# EAGLE board APA106_uno_shield (EAGLE 7.4.0)
CNAME: Scotty Allen
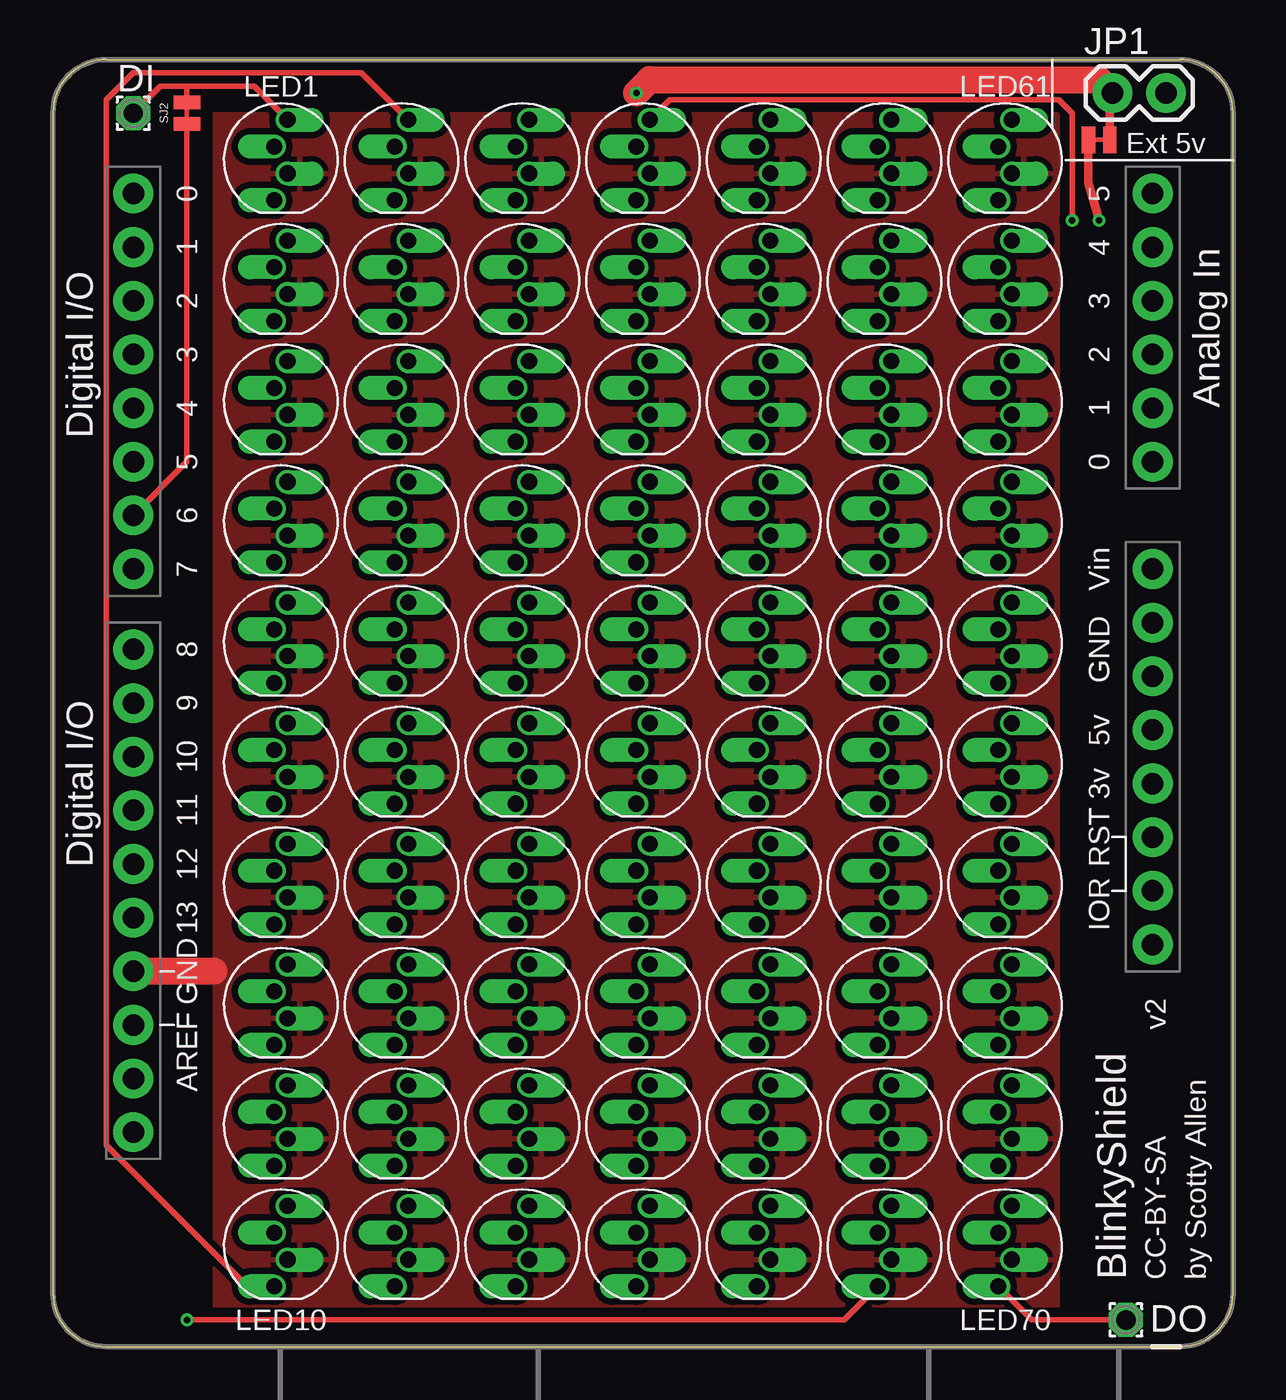
[diagram p0: board, top side]
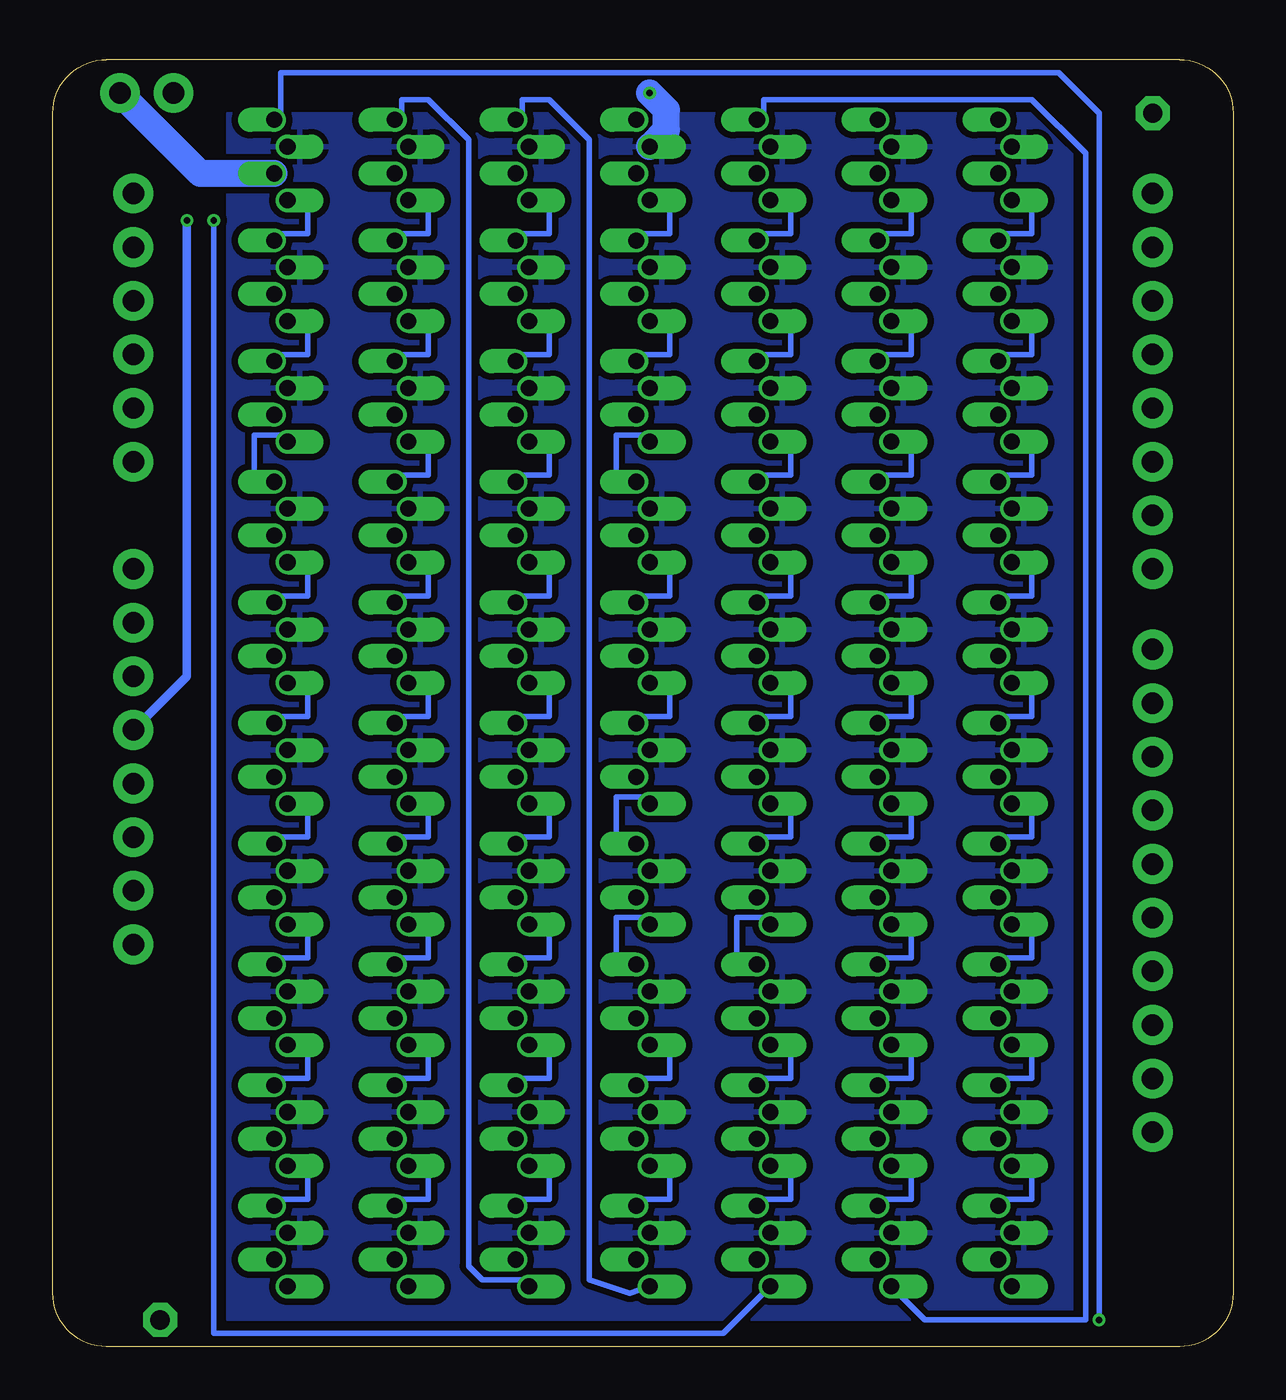
[diagram p1: board, bottom side, seen from below]

Size 55.88 x 60.96 mm. Coordinates in mm from the lower left corner, seen from the top.
Outline: 0,2.54 arc90 2.54,0 53.34,0 arc90 55.88,2.54 55.88,58.42 arc90 53.34,60.96 2.54,60.96 arc90 0,58.42 0,2.54
Copper layers (1*16): Top 0.035mm / dielectric 1.5mm / Bottom 0.035mm
Design rules "dirt_cheap_dirty_boards.v1 *": minimum track width 5mil, minimum drill 12mil, track to track 5mil, track to pad 5mil, pad to pad 5mil, via to via 5mil, smd to smd 0mil, copper to edge 10mil, drill to drill 10mil, minimum pad ring 5mil, minimum via ring 6mil, stop-mask expansion 2mil, vias tented up to drill 25mil, thermal gap 10mil
Net classes: 0 default: width 0.254 mm; 1 power: width 1.27 mm

## Footprints (pad centres in the part's own frame; a part is rotated, then mirrored left to right if it is on the bottom)
1,6/0,9 = drill 0.914 pad 1.6 octagon: 1 0,0
UNO_R3_SHIELD_NOLABELS = drill 1.016 pad 1.88: 3.3V 52.07,26.67; 5V 52.07,29.21; A0 52.07,41.91; A1 52.07,44.45; A2 52.07,46.99; A3 52.07,49.53; A4 52.07,52.07; A5 52.07,54.61; AREF 3.81,15.24; D2 3.81,49.53; D3 3.81,46.99; D4 3.81,44.45; D5 3.81,41.91; D6 3.81,39.37; D7 3.81,36.83; D8 3.81,33.02; D9 3.81,30.48; D10 3.81,27.94; D11 3.81,25.4; D12 3.81,22.86; D13 3.81,20.32; GND@0 52.07,31.75; GND@1 52.07,34.29; GND@2 3.81,17.78; IOREF 52.07,21.59; NC 52.07,19.05; RES 52.07,24.13; RX 3.81,54.61; SCL 3.81,10.16; SDA 3.81,12.7; TX 3.81,52.07; VIN 52.07,36.83
1X02 = drill 1.016 pad 1.88: 1 0,0; 2 2.54,0
LED-5MM-4PIN-HOLE-OFFSET = drill 0.762 pad 1.016 offset: 1 -1.905,0.318; 2 -0.635,-0.318; 3 0.635,0.318; 4 1.905,-0.318
PAD-JUMPER-2-NC_BY_TRACE_NO_SILK = smd 0.635 x 1.27: 1 -0.508,0; 2 0.508,0

## Placement (x,y rotation side)
DI  [1,6/0,9]  3.81,58.42 0 top
DO  [1,6/0,9]  50.8,1.27 0 top
FRAME1  FRAME-LETTER  [CREATIVE_COMMONS]  -5.71,-25.4 0 top  (outside the outline)
J1  ARDUINO_R3_SHIELDNOLABELS  [UNO_R3_SHIELD_NOLABELS]  0,0 0 top
JP1  [1X02]  50.16,59.37 0 top
LED1  LED-APA106HOLE-OFFSET  [LED-5MM-4PIN-HOLE-OFFSET]  10.79,56.2 270 top
LED2  LED-APA106HOLE-OFFSET  [LED-5MM-4PIN-HOLE-OFFSET]  10.79,50.48 270 top
LED3  LED-APA106HOLE-OFFSET  [LED-5MM-4PIN-HOLE-OFFSET]  10.79,44.77 270 top
LED4  LED-APA106HOLE-OFFSET  [LED-5MM-4PIN-HOLE-OFFSET]  10.79,39.05 270 top
LED5  LED-APA106HOLE-OFFSET  [LED-5MM-4PIN-HOLE-OFFSET]  10.79,33.34 270 top
LED6  LED-APA106HOLE-OFFSET  [LED-5MM-4PIN-HOLE-OFFSET]  10.79,27.62 270 top
LED7  LED-APA106HOLE-OFFSET  [LED-5MM-4PIN-HOLE-OFFSET]  10.79,21.91 270 top
LED8  LED-APA106HOLE-OFFSET  [LED-5MM-4PIN-HOLE-OFFSET]  10.79,16.19 270 top
LED9  LED-APA106HOLE-OFFSET  [LED-5MM-4PIN-HOLE-OFFSET]  10.79,10.48 270 top
LED10  LED-APA106HOLE-OFFSET  [LED-5MM-4PIN-HOLE-OFFSET]  10.79,4.76 270 top
LED11  LED-APA106HOLE-OFFSET  [LED-5MM-4PIN-HOLE-OFFSET]  16.51,56.2 270 top
LED12  LED-APA106HOLE-OFFSET  [LED-5MM-4PIN-HOLE-OFFSET]  16.51,50.48 270 top
LED13  LED-APA106HOLE-OFFSET  [LED-5MM-4PIN-HOLE-OFFSET]  16.51,44.77 270 top
LED14  LED-APA106HOLE-OFFSET  [LED-5MM-4PIN-HOLE-OFFSET]  16.51,39.05 270 top
LED15  LED-APA106HOLE-OFFSET  [LED-5MM-4PIN-HOLE-OFFSET]  16.51,33.34 270 top
LED16  LED-APA106HOLE-OFFSET  [LED-5MM-4PIN-HOLE-OFFSET]  16.51,27.62 270 top
LED17  LED-APA106HOLE-OFFSET  [LED-5MM-4PIN-HOLE-OFFSET]  16.51,21.91 270 top
LED18  LED-APA106HOLE-OFFSET  [LED-5MM-4PIN-HOLE-OFFSET]  16.51,16.19 270 top
LED19  LED-APA106HOLE-OFFSET  [LED-5MM-4PIN-HOLE-OFFSET]  16.51,10.48 270 top
LED20  LED-APA106HOLE-OFFSET  [LED-5MM-4PIN-HOLE-OFFSET]  16.51,4.76 270 top
LED21  LED-APA106HOLE-OFFSET  [LED-5MM-4PIN-HOLE-OFFSET]  22.23,56.2 270 top
LED22  LED-APA106HOLE-OFFSET  [LED-5MM-4PIN-HOLE-OFFSET]  22.23,50.48 270 top
LED23  LED-APA106HOLE-OFFSET  [LED-5MM-4PIN-HOLE-OFFSET]  22.23,44.77 270 top
LED24  LED-APA106HOLE-OFFSET  [LED-5MM-4PIN-HOLE-OFFSET]  22.23,39.05 270 top
LED25  LED-APA106HOLE-OFFSET  [LED-5MM-4PIN-HOLE-OFFSET]  22.23,33.34 270 top
LED26  LED-APA106HOLE-OFFSET  [LED-5MM-4PIN-HOLE-OFFSET]  22.23,27.62 270 top
LED27  LED-APA106HOLE-OFFSET  [LED-5MM-4PIN-HOLE-OFFSET]  22.23,21.91 270 top
LED28  LED-APA106HOLE-OFFSET  [LED-5MM-4PIN-HOLE-OFFSET]  22.23,16.19 270 top
LED29  LED-APA106HOLE-OFFSET  [LED-5MM-4PIN-HOLE-OFFSET]  22.23,10.48 270 top
LED30  LED-APA106HOLE-OFFSET  [LED-5MM-4PIN-HOLE-OFFSET]  22.23,4.76 270 top
LED31  LED-APA106HOLE-OFFSET  [LED-5MM-4PIN-HOLE-OFFSET]  27.94,56.2 270 top
LED32  LED-APA106HOLE-OFFSET  [LED-5MM-4PIN-HOLE-OFFSET]  27.94,50.48 270 top
LED33  LED-APA106HOLE-OFFSET  [LED-5MM-4PIN-HOLE-OFFSET]  27.94,44.77 270 top
LED34  LED-APA106HOLE-OFFSET  [LED-5MM-4PIN-HOLE-OFFSET]  27.94,39.05 270 top
LED35  LED-APA106HOLE-OFFSET  [LED-5MM-4PIN-HOLE-OFFSET]  27.94,33.34 270 top
LED36  LED-APA106HOLE-OFFSET  [LED-5MM-4PIN-HOLE-OFFSET]  27.94,27.62 270 top
LED37  LED-APA106HOLE-OFFSET  [LED-5MM-4PIN-HOLE-OFFSET]  27.94,21.91 270 top
LED38  LED-APA106HOLE-OFFSET  [LED-5MM-4PIN-HOLE-OFFSET]  27.94,16.19 270 top
LED39  LED-APA106HOLE-OFFSET  [LED-5MM-4PIN-HOLE-OFFSET]  27.94,10.48 270 top
LED40  LED-APA106HOLE-OFFSET  [LED-5MM-4PIN-HOLE-OFFSET]  27.94,4.76 270 top
LED41  LED-APA106HOLE-OFFSET  [LED-5MM-4PIN-HOLE-OFFSET]  33.66,56.2 270 top
LED42  LED-APA106HOLE-OFFSET  [LED-5MM-4PIN-HOLE-OFFSET]  33.66,50.48 270 top
LED43  LED-APA106HOLE-OFFSET  [LED-5MM-4PIN-HOLE-OFFSET]  33.66,44.77 270 top
LED44  LED-APA106HOLE-OFFSET  [LED-5MM-4PIN-HOLE-OFFSET]  33.66,39.05 270 top
LED45  LED-APA106HOLE-OFFSET  [LED-5MM-4PIN-HOLE-OFFSET]  33.66,33.34 270 top
LED46  LED-APA106HOLE-OFFSET  [LED-5MM-4PIN-HOLE-OFFSET]  33.66,27.62 270 top
LED47  LED-APA106HOLE-OFFSET  [LED-5MM-4PIN-HOLE-OFFSET]  33.66,21.91 270 top
LED48  LED-APA106HOLE-OFFSET  [LED-5MM-4PIN-HOLE-OFFSET]  33.66,16.19 270 top
LED49  LED-APA106HOLE-OFFSET  [LED-5MM-4PIN-HOLE-OFFSET]  33.66,10.48 270 top
LED50  LED-APA106HOLE-OFFSET  [LED-5MM-4PIN-HOLE-OFFSET]  33.66,4.76 270 top
LED51  LED-APA106HOLE-OFFSET  [LED-5MM-4PIN-HOLE-OFFSET]  39.37,56.2 270 top
LED52  LED-APA106HOLE-OFFSET  [LED-5MM-4PIN-HOLE-OFFSET]  39.37,50.48 270 top
LED53  LED-APA106HOLE-OFFSET  [LED-5MM-4PIN-HOLE-OFFSET]  39.37,44.77 270 top
LED54  LED-APA106HOLE-OFFSET  [LED-5MM-4PIN-HOLE-OFFSET]  39.37,39.05 270 top
LED55  LED-APA106HOLE-OFFSET  [LED-5MM-4PIN-HOLE-OFFSET]  39.37,33.34 270 top
LED56  LED-APA106HOLE-OFFSET  [LED-5MM-4PIN-HOLE-OFFSET]  39.37,27.62 270 top
LED57  LED-APA106HOLE-OFFSET  [LED-5MM-4PIN-HOLE-OFFSET]  39.37,21.91 270 top
LED58  LED-APA106HOLE-OFFSET  [LED-5MM-4PIN-HOLE-OFFSET]  39.37,16.19 270 top
LED59  LED-APA106HOLE-OFFSET  [LED-5MM-4PIN-HOLE-OFFSET]  39.37,10.48 270 top
LED60  LED-APA106HOLE-OFFSET  [LED-5MM-4PIN-HOLE-OFFSET]  39.37,4.76 270 top
LED61  LED-APA106HOLE-OFFSET  [LED-5MM-4PIN-HOLE-OFFSET]  45.09,56.2 270 top
LED62  LED-APA106HOLE-OFFSET  [LED-5MM-4PIN-HOLE-OFFSET]  45.09,50.48 270 top
LED63  LED-APA106HOLE-OFFSET  [LED-5MM-4PIN-HOLE-OFFSET]  45.09,44.77 270 top
LED64  LED-APA106HOLE-OFFSET  [LED-5MM-4PIN-HOLE-OFFSET]  45.09,39.05 270 top
LED65  LED-APA106HOLE-OFFSET  [LED-5MM-4PIN-HOLE-OFFSET]  45.09,33.34 270 top
LED66  LED-APA106HOLE-OFFSET  [LED-5MM-4PIN-HOLE-OFFSET]  45.09,27.62 270 top
LED67  LED-APA106HOLE-OFFSET  [LED-5MM-4PIN-HOLE-OFFSET]  45.09,21.91 270 top
LED68  LED-APA106HOLE-OFFSET  [LED-5MM-4PIN-HOLE-OFFSET]  45.09,16.19 270 top
LED69  LED-APA106HOLE-OFFSET  [LED-5MM-4PIN-HOLE-OFFSET]  45.09,10.48 270 top
LED70  LED-APA106HOLE-OFFSET  [LED-5MM-4PIN-HOLE-OFFSET]  45.09,4.76 270 top
SJ1  JUMPER-PAD-2-NC_BY_TRACENO_SILK  [PAD-JUMPER-2-NC_BY_TRACE_NO_SILK]  49.53,57.15 0 top
SJ2  JUMPER-PAD-2-NC_BY_TRACENO_SILK  [PAD-JUMPER-2-NC_BY_TRACE_NO_SILK]  6.35,58.42 90 top

## Library data of the parts
DI DO = wirepad
FRAME1 = SparkFun-Aesthetics
J1 LED1-LED70 SJ1 SJ2 = scotty
JP1 = SparkFun-Connectors

## Nets
DI: DI.1 LED1.1 SJ2.2
GND [power]: J1.GND@2 JP1.2 LED1.3 LED2.3 LED3.3 LED4.3 LED5.3 LED6.3 LED7.3 LED8.3 LED9.3 LED10.3 LED11.3 LED12.3 LED13.3 LED14.3 LED15.3 LED16.3 LED17.3 LED18.3 LED19.3 LED20.3 LED21.3 LED22.3 LED23.3 LED24.3 LED25.3 LED26.3 LED27.3 LED28.3 LED29.3 LED30.3 LED31.3 LED32.3 LED33.3 LED34.3 LED35.3 LED36.3 LED37.3 LED38.3 LED39.3 LED40.3 LED41.3 LED42.3 LED43.3 LED44.3 LED45.3 LED46.3 LED47.3 LED48.3 LED49.3 LED50.3 LED51.3 LED52.3 LED53.3 LED54.3 LED55.3 LED56.3 LED57.3 LED58.3 LED59.3 LED60.3 LED61.3 LED62.3 LED63.3 LED64.3 LED65.3 LED66.3 LED67.3 LED68.3 LED69.3 LED70.3
N$1: LED1.4 LED2.1
N$2: LED2.4 LED3.1
N$3: LED3.4 LED4.1
N$4: LED4.4 LED5.1
N$5: LED6.4 LED7.1
N$6: LED7.4 LED8.1
N$7: LED37.4 LED38.1
N$8: LED5.4 LED6.1
N$9: LED8.4 LED9.1
N$10: LED10.4 LED11.1
N$11: LED19.4 LED20.1
N$12: LED20.4 LED21.1
N$13: LED11.4 LED12.1
N$14: LED12.4 LED13.1
N$15: LED21.4 LED22.1
N$16: LED22.4 LED23.1
N$17: LED18.4 LED19.1
N$18: LED23.4 LED24.1
N$19: LED13.4 LED14.1
N$20: LED9.4 LED10.1
N$21: LED14.4 LED15.1
N$22: LED15.4 LED16.1
N$23: LED16.4 LED17.1
N$24: LED17.4 LED18.1
N$25: LED24.4 LED25.1
N$26: LED25.4 LED26.1
N$27: LED26.4 LED27.1
N$28: LED28.4 LED29.1
N$29: LED29.4 LED30.1
N$30: LED30.4 LED31.1
N$31: LED31.4 LED32.1
N$32: LED27.4 LED28.1
N$33: LED32.4 LED33.1
N$34: LED33.4 LED34.1
N$35: LED34.4 LED35.1
N$36: LED35.4 LED36.1
N$37: LED38.4 LED39.1
N$38: LED39.4 LED40.1
N$39: LED40.4 LED41.1
N$40: LED36.4 LED37.1
N$41: LED41.4 LED42.1
N$42: LED42.4 LED43.1
N$43: LED43.4 LED44.1
N$44: LED44.4 LED45.1
N$45: LED46.4 LED47.1
N$46: LED47.4 LED48.1
N$47: LED48.4 LED49.1
N$48: LED49.4 LED50.1
N$49: LED45.4 LED46.1
N$50: LED50.4 LED51.1
N$51: LED51.4 LED52.1
N$52: LED52.4 LED53.1
N$53: LED53.4 LED54.1
N$54: LED55.4 LED56.1
N$55: LED56.4 LED57.1
N$56: LED57.4 LED58.1
N$57: LED58.4 LED59.1
N$58: LED54.4 LED55.1
N$59: LED59.4 LED60.1
N$60: LED60.4 LED61.1
N$61: LED61.4 LED62.1
N$62: LED62.4 LED63.1
N$63: LED64.4 LED65.1
N$64: LED65.4 LED66.1
N$65: LED67.4 LED68.1
N$66: LED63.4 LED64.1
N$67: LED68.4 LED69.1
N$68: LED66.4 LED67.1
N$69: LED69.4 LED70.1
N$70 [power]: J1.5V SJ1.1
N$71: DO.1 LED70.4
N$72: J1.D6 SJ2.1
VCC [power]: JP1.1 LED1.2 LED2.2 LED3.2 LED4.2 LED5.2 LED6.2 LED7.2 LED8.2 LED9.2 LED10.2 LED11.2 LED12.2 LED13.2 LED14.2 LED15.2 LED16.2 LED17.2 LED18.2 LED19.2 LED20.2 LED21.2 LED22.2 LED23.2 LED24.2 LED25.2 LED26.2 LED27.2 LED28.2 LED29.2 LED30.2 LED31.2 LED32.2 LED33.2 LED34.2 LED35.2 LED36.2 LED37.2 LED38.2 LED39.2 LED40.2 LED41.2 LED42.2 LED43.2 LED44.2 LED45.2 LED46.2 LED47.2 LED48.2 LED49.2 LED50.2 LED51.2 LED52.2 LED53.2 LED54.2 LED55.2 LED56.2 LED57.2 LED58.2 LED59.2 LED60.2 LED61.2 LED62.2 LED63.2 LED64.2 LED65.2 LED66.2 LED67.2 LED68.2 LED69.2 LED70.2 SJ1.2

## Tracks (layer width: path | path; a pad name or v marks a point on that pad's centre or on a via)
DI
  Top 0.254: LED1.1 9.53,59.69 6.35,59.69 | 6.35,59.69 5.08,59.69 DI.1 | SJ2.2 6.35,59.69
GND
  Top 1.27: 7.62,17.78 J1.GND@2
  Bottom 1.27: JP1.2 48.9,55.56 LED61.3
  pour Top (isolate 0.305): 7.62,58.42 47.62,58.42 47.62,39.37 47.62,1.91 7.62,1.91 7.62,2.54
N$1
  Bottom 0.254: LED2.1 10.79,52.7 9.53,52.7 9.53,53.98 10.16,54.61 LED1.4
N$2
  Bottom 0.254: LED3.1 10.79,46.99 9.53,46.99 9.53,48.26 10.16,48.9 LED2.4
N$3
  Bottom 0.254: LED4.1 10.79,41.27 9.53,41.27 9.53,42.55 10.16,43.18 LED3.4
N$4
  Bottom 0.254: LED5.1 10.79,35.56 9.53,35.56 9.53,36.83 10.16,37.47 LED4.4
N$5
  Bottom 0.254: LED7.1 10.79,24.13 9.53,24.13 9.53,25.4 10.16,26.04 LED6.4
N$6
  Bottom 0.254: LED8.1 10.79,18.41 9.53,18.41 9.53,19.68 10.16,20.32 LED7.4
N$7
  Bottom 0.254: LED37.4 27.94,20.32 29.21,20.32 29.21,18.41 28.57,17.78 LED38.1
N$8
  Bottom 0.254: LED6.1 10.79,29.84 9.53,29.84 9.53,31.11 10.16,31.75 LED5.4
N$9
  Bottom 0.254: LED9.1 10.79,12.7 9.53,12.7 9.53,13.97 10.16,14.61 LED8.4
N$10
  Top 0.254: LED11.1 14.61,60.33 3.81,60.33 2.54,59.05 2.54,9.53 8.89,3.17 10.16,3.17 LED10.4
N$11
  Bottom 0.254: LED20.1 16.51,6.99 15.24,6.99 15.24,8.26 15.88,8.89 LED19.4
N$12
  Bottom 0.254: LED20.4 14.61,1.27 6.99,1.27 6.99,56.52 9.53,59.05 22.23,59.05 22.23,58.42 LED21.1
N$13
  Bottom 0.254: LED12.1 16.51,52.7 15.24,52.7 15.24,53.98 15.88,54.61 LED11.4
N$14
  Bottom 0.254: LED13.1 16.51,46.99 15.24,46.99 15.24,48.26 15.88,48.9 LED12.4
N$15
  Bottom 0.254: LED22.1 22.23,52.7 20.95,52.7 20.95,53.98 21.59,54.61 LED21.4
N$16
  Bottom 0.254: LED23.1 22.23,46.99 20.95,46.99 20.95,48.26 21.59,48.9 LED22.4
N$17
  Bottom 0.254: LED19.1 16.51,12.7 15.24,12.7 15.24,13.97 15.88,14.61 LED18.4
N$18
  Bottom 0.254: LED24.1 22.23,41.27 20.95,41.27 20.95,42.55 21.59,43.18 LED23.4
N$19
  Bottom 0.254: LED14.1 16.51,41.27 15.24,41.27 15.24,42.55 15.88,43.18 LED13.4
N$20
  Bottom 0.254: LED10.1 10.79,6.99 9.53,6.99 9.53,8.26 10.16,8.89 LED9.4
N$21
  Bottom 0.254: LED15.1 16.51,35.56 15.24,35.56 15.24,36.83 15.88,37.47 LED14.4
N$22
  Bottom 0.254: LED16.1 16.51,29.84 15.24,29.84 15.24,31.11 15.88,31.75 LED15.4
N$23
  Bottom 0.254: LED17.1 16.51,24.13 15.24,24.13 15.24,25.4 15.88,26.04 LED16.4
N$24
  Bottom 0.254: LED18.1 16.51,18.41 15.24,18.41 15.24,19.68 15.88,20.32 LED17.4
N$25
  Bottom 0.254: LED25.1 22.23,35.56 20.95,35.56 20.95,36.83 21.59,37.47 LED24.4
N$26
  Bottom 0.254: LED26.1 22.23,29.84 20.95,29.84 20.95,31.11 21.59,31.75 LED25.4
N$27
  Bottom 0.254: LED27.1 22.23,24.13 20.95,24.13 20.95,25.4 21.59,26.04 LED26.4
N$28
  Bottom 0.254: LED29.1 22.23,12.7 20.95,12.7 20.95,13.97 21.59,14.61 LED28.4
N$29
  Bottom 0.254: LED30.1 22.23,6.99 20.95,6.99 20.95,8.26 21.59,8.89 LED29.4
N$30  (via drill 0.3)
  Top 0.254: v48.26,53.34 48.26,58.42 47.62,59.05 29.21,59.05 LED31.1
  Bottom 0.254: LED30.4 24.13,0.64 48.26,0.64 v48.26,53.34
N$31
  Bottom 0.254: LED32.1 27.94,52.7 26.67,52.7 26.67,53.98 27.3,54.61 LED31.4
N$32
  Bottom 0.254: LED27.4 22.23,20.32 23.5,20.32 23.5,18.41 22.86,17.78 LED28.1
N$33
  Bottom 0.254: LED33.1 27.94,46.99 26.67,46.99 26.67,48.26 27.3,48.9 LED32.4
N$34
  Bottom 0.254: LED33.4 27.94,43.18 29.21,43.18 29.21,41.27 28.57,40.64 LED34.1
N$35
  Bottom 0.254: LED35.1 27.94,35.56 26.67,35.56 26.67,36.83 27.3,37.47 LED34.4
N$36
  Bottom 0.254: LED36.1 27.94,29.84 26.67,29.84 26.67,31.11 27.3,31.75 LED35.4
N$37
  Bottom 0.254: LED39.1 27.94,12.7 26.67,12.7 26.67,13.97 27.3,14.61 LED38.4
N$38
  Bottom 0.254: LED40.1 27.94,6.99 26.67,6.99 26.67,8.26 27.3,8.89 LED39.4
N$39
  Bottom 0.254: LED40.4 28.57,2.54 30.48,3.17 30.48,57.15 32.38,59.05 33.66,59.05 33.66,58.42 LED41.1
N$40
  Bottom 0.254: LED36.4 27.94,26.04 29.21,26.04 29.21,24.13 28.57,23.5 LED37.1
N$41
  Bottom 0.254: LED42.1 33.66,52.7 32.38,52.7 32.38,53.98 33.02,54.61 LED41.4
N$42
  Bottom 0.254: LED43.1 33.66,46.99 32.38,46.99 32.38,48.26 33.02,48.9 LED42.4
N$43
  Bottom 0.254: LED44.1 33.66,41.27 32.38,41.27 32.38,42.55 33.02,43.18 LED43.4
N$44
  Bottom 0.254: LED45.1 33.66,35.56 32.38,35.56 32.38,36.83 33.02,37.47 LED44.4
N$45
  Bottom 0.254: LED47.1 33.66,24.13 32.38,24.13 32.38,25.4 33.02,26.04 LED46.4
N$46
  Bottom 0.254: LED48.1 33.66,18.41 32.38,18.41 32.38,19.68 33.02,20.32 LED47.4
N$47
  Bottom 0.254: LED49.1 33.66,12.7 32.38,12.7 32.38,13.97 33.02,14.61 LED48.4
N$48
  Bottom 0.254: LED50.1 33.66,6.99 32.38,6.99 32.38,8.26 33.02,8.89 LED49.4
N$49
  Bottom 0.254: LED46.1 33.66,29.84 32.38,29.84 32.38,31.11 33.02,31.75 LED45.4
N$50
  Bottom 0.254: LED50.4 33.66,3.17 35.56,3.17 36.2,3.81 36.2,57.15 38.1,59.05 39.37,59.05 39.37,58.42 LED51.1
N$51
  Bottom 0.254: LED52.1 39.37,52.7 38.1,52.7 38.1,53.98 38.73,54.61 LED51.4
N$52
  Bottom 0.254: LED53.1 39.37,46.99 38.1,46.99 38.1,48.26 38.73,48.9 LED52.4
N$53
  Bottom 0.254: LED54.1 39.37,41.27 38.1,41.27 38.1,42.55 38.73,43.18 LED53.4
N$54
  Bottom 0.254: LED56.1 39.37,29.84 38.1,29.84 38.1,31.11 38.73,31.75 LED55.4
N$55
  Bottom 0.254: LED57.1 39.37,24.13 38.1,24.13 38.1,25.4 38.73,26.04 LED56.4
N$56
  Bottom 0.254: LED58.1 39.37,18.41 38.1,18.41 38.1,19.68 38.73,20.32 LED57.4
N$57
  Bottom 0.254: LED59.1 39.37,12.7 38.1,12.7 38.1,13.97 38.73,14.61 LED58.4
N$58
  Bottom 0.254: LED55.1 39.37,35.56 38.1,35.56 38.1,36.83 38.73,37.47 LED54.4
N$59
  Bottom 0.254: LED60.1 39.37,6.99 38.1,6.99 38.1,8.26 38.73,8.89 LED59.4
N$60  (via drill 0.3)
  Top 0.254: LED60.4 37.47,1.27 v6.35,1.27
  Bottom 0.254: v6.35,1.27 6.35,58.42 8.26,60.33 45.09,60.33 45.09,58.42 LED61.1
N$61
  Bottom 0.254: LED62.1 45.09,52.7 43.81,52.7 43.81,53.98 44.45,54.61 LED61.4
N$62
  Bottom 0.254: LED63.1 45.09,46.99 43.81,46.99 43.81,48.26 44.45,48.9 LED62.4
N$63
  Bottom 0.254: LED65.1 45.09,35.56 43.81,35.56 43.81,36.83 44.45,37.47 LED64.4
N$64
  Bottom 0.254: LED66.1 45.09,29.84 43.81,29.84 43.81,31.11 44.45,31.75 LED65.4
N$65
  Bottom 0.254: LED68.1 45.09,18.41 43.81,18.41 43.81,19.68 44.45,20.32 LED67.4
N$66
  Bottom 0.254: LED63.4 45.09,43.18 46.35,43.18 46.35,41.27 45.72,40.64 LED64.1
N$67
  Bottom 0.254: LED69.1 45.09,12.7 43.81,12.7 43.81,13.97 44.45,14.61 LED68.4
N$68
  Bottom 0.254: LED67.1 45.09,24.13 43.81,24.13 43.81,25.4 44.45,26.04 LED66.4
N$69
  Bottom 0.254: LED70.1 45.09,6.99 43.81,6.99 43.81,8.26 44.45,8.89 LED69.4
N$70  (via drill 0.3)
  Top 0.406: SJ1.1 49.02,55.12 v49.53,53.34
  Bottom 0.406: v49.53,53.34 49.53,31.75 J1.5V
N$71
  Top 0.254: LED70.4 46.35,1.27 DO.1
N$72
  Top 0.254: J1.D6 6.35,41.91 SJ2.1
VCC  (via drill 0.3)
  Top 0.406: 50.04,59.37 SJ1.2
  Top 1.27: v27.62,59.37 28.26,60.01 49.53,60.01 JP1.1 50.04,59.37
  Bottom 1.27: v27.62,59.37 26.83,58.58 26.83,57.63 LED31.2
  pour Bottom (isolate 0.305): 7.62,58.42 47.62,58.42 47.62,1.27 7.62,1.27

## Text on the board
tPlace: Ext 5v | v2 | BlinkyShield | CC-BY-SA | by Scotty Allen